# Altium PCB develer_2L_A4.PcbDoc
Units mm, origin at the board's own origin, x right, y up, seen from the top; angles counter-clockwise.
Board outline 16 x 12 mm, 2 copper layers (Top Layer, Bottom Layer), stack 1.57 mm thick; 3 components, 10 nets, 36 pads, 10 vias.
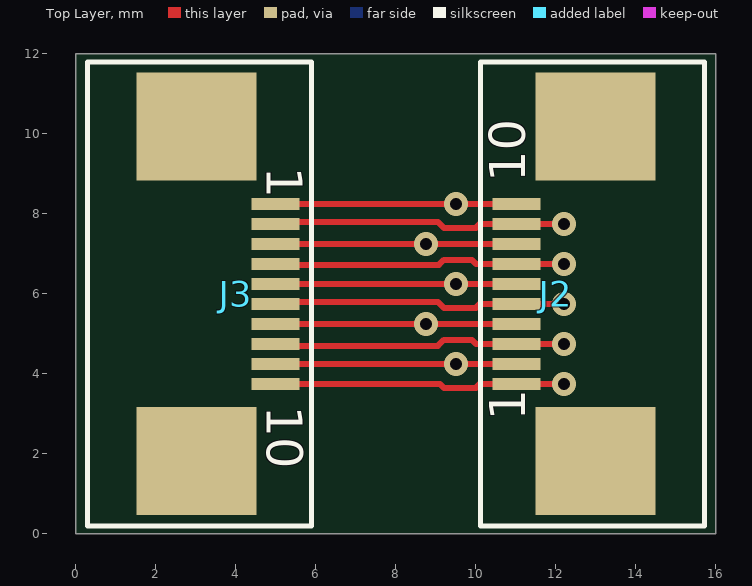
[diagram p0: Top Layer view]
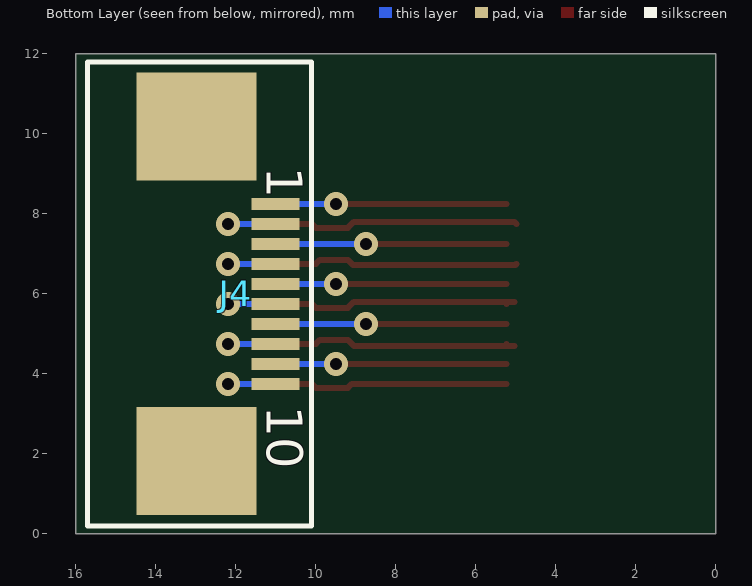
[diagram p1: Bottom Layer view, seen from below]

## Layer stack, top to bottom
Top Solder: solder mask 0.01, Solder Resist, Dk 3.5
Top Layer: signal copper 0.035
Dielectric1: core 1.5, FR-4, Dk 4.2
Bottom Layer: signal copper 0.035
Bottom Solder: solder mask 0.01, Solder Resist, Dk 3.5

## Board outline
0,0 0,12 16,12 16,0

## Design rules (kind name [scope] priority, off if disabled: settings)
Clearance [All] p1: gap=0.15 ignorepadtopadclearanceinfootprint=FALSE
ComponentClearance ComponentClearance_logo [HasFootprint('Develer_logo_30x12mm_PCB_NOTE') vs HasFootprint('Develer_logo_30x12mm_TB_Top')] p1: gap=0 collisioncheckmode=3 verticalgap=0 showdistances=FALSE
ComponentClearance [All] p2: gap=0.25 collisioncheckmode=3 verticalgap=0.25 showdistances=FALSE
DiffPairsRouting [All] p1: maxlimit=0.25 minlimit=0.25 mostfreqgap=0.25 toplayer_minwidth=0.25 toplayer_maxwidth=0.25 toplayer_prefwidth=0.25 bottomlayer_minwidth=0.25 bottomlayer_maxwidth=0.25 bottomlayer_prefwidth=0.25 maxuncoupledlength=12.7
Height [All] p1: minheight=0 maxheight=25 prefheight=12.5
HoleSize [All] p1: absolutevalues=TRUE maxlimit=10 minlimit=0.2 maxpercent=80.000 minpercent=20.000
HoleToHoleClearance [All] p1: gap=0.25 allowstackedmicrovias=TRUE
MinimumSolderMaskSliver [All] p1: minsoldermaskwidth=0.15
PlaneClearance [All] p1: clearance=0.5
PlaneConnect PlaneConnect_via [isvia] p1: planeconnectstyle=Direct reliefexpansion=0.508 reliefentries=4 reliefconductorwidth=0.254 reliefairgap=0.254
PlaneConnect [All] p2: planeconnectstyle=Relief reliefexpansion=0.6 reliefentries=4 reliefconductorwidth=0.6 reliefairgap=0.3
PolygonConnect PolygonConnect_via [isvia] p1: connectstyle=Direct reliefconductorwidth=0.254 reliefentries=4 polygonreliefangle="90 Angle" airgapwidth=0.254
PolygonConnect [All] p2: connectstyle=Relief reliefconductorwidth=0.6 reliefentries=4 polygonreliefangle="90 Angle" airgapwidth=0.6
RoutingCorners [All] p1: cornerstyle=45-Degree minsetback=2.5 maxsetback=2.5
RoutingVias [All] p1: holewidth=0.3 width=0.6 viastyle="Through Hole" minholewidth=0.2 minwidth=0.3 maxholewidth=0.5 maxwidth=1
SilkToSilkClearance [All] p1: silktosilkclearance=0.15
SilkToSolderMaskClearance [IsPad] p1: minsilkscreentomaskgap=0.15 clearancetoexposedcopper=TRUE
SolderMaskExpansion SolderMaskExpansion_via [isVia] p1: expansion=-10
SolderMaskExpansion [All] p2: expansion=0.05
UnRoutedNet [All] p1: checkbadconnections=TRUE
Width [All] p1: maxlimit=5 minlimit=0.15 preferedwidth=0.25
18 further rules are at their usual default settings.

## Components (designator, comment, footprint, x,y, rotation, side; value= is the part's Value field where it differs from the comment)
J2 "Capacitive Touch" fcc-zif_10pin_0.5mm 12,6 r90 top
J3 "Capacitive Touch" fcc-zif_10pin_0.5mm 4,6 r270 top
J4 "Capacitive Touch" fcc-zif_10pin_0.5mm 12,6 r270 bottom

## Footprints (in the part's own frame and the unit in brackets; to place one, negate y for a bottom-side part, rotate by r counter-clockwise, add the part's x,y. Pads: shape width x height; smd on the part's side, far side on the other; paste and mask are expansions set on the pad)
fcc-zif_10pin_0.5mm [mm] "10 pins"
  rect 0.3x1.2 smd: 1(-2.25,0.99) 2(-1.75,0.99) 3(-1.25,0.99) 4(-0.75,0.99) 5(-0.25,0.99) 6(0.25,0.99) 7(0.75,0.99) 8(1.25,0.99) 9(1.75,0.99) 10(2.25,0.99)
  rect 2.7x3 smd: Z1(-4.18,-0.99) Z2(4.18,-0.99)
  silkscreen extent -5.8,-3.71 5.8,1.89, body extent -5.7,-3.71 5.7,1.39, height 2.06

## Part data
J2 J3 J4: library part "Header 10", "10-pin, 0.5mm, SMT, ZIF, Horizontal, Top Contact", LatestRevisionDate=17-Jul-2002, LatestRevisionNote="Re-released for DXP Platform.", Publisher="Altium Limited"

## Via types
v1: diameter 0.6, hole 0.3, Top Layer to Bottom Layer, 10 vias

## Nets (pads, with @x,y where several pads share a name; then routed paths per layer and width w, separated by ;. In a path a pad name is that pad's centre, name@x,y a point inside that pad or via, vN(x,y) a via of type N, cw(c..) or ccw(c..) an arc to the next point about the centre after c; other vN are vias at no path point)
NetJ2_1: J2.1 J3.10 J4.10 | length 8.2
  Top Layer w0.15: J3.10@5.24,3.75 9.1,3.75 9.2,3.65 10,3.65 10.1,3.75 11.01,3.75 v1(12.2,3.75)
  Bottom Layer w0.15: J4.10@11.01,3.75 v1(12.2,3.75)
NetJ2_2: J2.2 J3.9 J4.9 | length 7.3
  Top Layer w0.15: J3.9@5.24,4.25 v1(9.5,4.25) J2.2
  Bottom Layer w0.15: v1(9.5,4.25) J4.9
NetJ2_3: J2.3 J3.8 J4.8 | length 8.5
  Top Layer w0.15: J3.8@5.04,4.7 9.05,4.7 9.2,4.85 9.9,4.85 10,4.75 J2.3 v1(12.2,4.75)
  Bottom Layer w0.15: J4.8 v1(12.2,4.75)
NetJ2_4: J2.4 J3.7 J4.7 | length 8
  Top Layer w0.15: J3.7@5.24,5.25 v1(8.75,5.25) J2.4
  Bottom Layer w0.15: v1(8.75,5.25) J4.7
NetJ2_5: J2.5 J3.6 J4.6 | length 8.5
  Top Layer w0.15: J3.6@5.04,5.8 9.05,5.8 9.2,5.65 10,5.65 10.1,5.75 J2.5 v1(12.2,5.75)
  Bottom Layer w0.15: J4.6 v1(12.2,5.75)
NetJ2_6: J2.6 J3.5 J4.5 | length 7.3
  Top Layer w0.15: J3.5@5.24,6.25 v1(9.5,6.25) J2.6
  Bottom Layer w0.15: v1(9.5,6.25) J4.5
NetJ2_7: J2.7 J3.4 J4.4 | length 8.5
  Top Layer w0.15: J3.4 5.015,6.725 9.075,6.725 9.2,6.85 9.9,6.85 10,6.75 v1(12.2,6.75)
  Bottom Layer w0.15: J4.4 v1(12.2,6.75)
NetJ2_8: J2.8 J3.3 J4.3 | length 8
  Top Layer w0.15: J3.3@5.24,7.25 v1(8.75,7.25) J2.8
  Bottom Layer w0.15: v1(8.75,7.25) J4.3
NetJ2_9: J2.9 J3.2 J4.2 | length 8.5
  Top Layer w0.15: J3.2 5.04,7.8 9.05,7.8 9.2,7.65 10,7.65 10.1,7.75 v1(12.2,7.75)
  Bottom Layer w0.15: J4.2 v1(12.2,7.75)
NetJ2_10: J2.10 J3.1 J4.1 | length 7.3
  Top Layer w0.15: J3.1@5.24,8.25 v1(9.5,8.25) J2.10
  Bottom Layer w0.15: v1(9.5,8.25) J4.1
pads on no net: J2.Z1 J2.Z2 J3.Z1 J3.Z2 J4.Z1 J4.Z2

## Silkscreen, mask and mechanical layers (free items; w line width, h text height)
Outline:
  the board outline again, w0.2
Drawing:
  text "Mechanical Characteristics" at 24.5,-44.5 h5
  text "Mechanical Characteristics" at 24.5,-44.5 h5
Assembly_top:
  text "Assembly TOP" at 24.5,-44.5 h5
Assembly_bot:
  text "Assembly Bottom" at -127.5,-44.25 h5
Note_top:
  text "Note TOP" at 24.5,-44.5 h5
Note_bot:
  text "Note Bottom" at -127.5,-44.25 h5
PCB_Note:
  drawing of 186 lines, arcs and shapes, not listed
  text "Plugged Vias" at 58.25,27.25 h5
  text "File Layer names:" at 56.25,24 h3.5
  text "GTO" at 56.25,20 h3
  text "Top Overlay" at 65.25,20 h3
  text "GTP" at 56.25,17 h3
  text "Top Paste" at 65.25,17 h3
  text "GTS" at 56.25,14 h3
  text "Top Solder" at 65.25,14 h3
  text "GTL" at 56.25,11 h3
  text "Top Layer" at 65.25,11 h3
  text "GBL" at 56.25,8 h3
  text "Bottom Layer" at 65.25,8 h3
  text "GBS" at 56.25,5 h3
  text "Bottom Solder" at 65.25,5 h3
  text "GBP" at 56.25,2 h3
  text "Bottom Paste" at 65.25,2 h3
  text "GBO" at 56.25,-1 h3
  text "Bottom Overlay" at 65.25,-1 h3
  text "GM1" at 56.25,-7 h3
  text "Outline" at 65.25,-7 h3
  text "GM7" at 56.25,-10 h3
  text "PCB_Note" at 65.25,-10 h3
  text "Layer" at 33.353,-15.546 h1.52
  text "Name" at 39.336,-15.546 h1.52
  text "Material" at 50.911,-15.546 h1.52
  text "Thickness" at 61.073,-15.546 h1.52
  text "Constant" at 69.524,-15.546 h1.52
  text "Board Layer Stack" at 77.443,-15.546 h1.52
  text "1" at 33.353,-18.594 h1.52
  text "Top Overlay" at 39.336,-18.594 h1.52
  text "2" at 33.353,-21.642 h1.52
  text "Top Solder" at 39.336,-21.642 h1.52
  text "Solder Resist" at 50.911,-21.642 h1.52
  text "0,39mil" at 61.073,-21.642 h1.52
  text "3,5" at 69.524,-21.642 h1.52
  text "3" at 33.353,-24.69 h1.52
  text "Top Layer" at 39.336,-24.69 h1.52
  text "Copper" at 50.911,-24.69 h1.52
  text "1,38mil" at 61.073,-24.69 h1.52
  text "4" at 33.353,-27.738 h1.52
  text "Dielectric1" at 39.336,-27.738 h1.52
  text "FR-4" at 50.911,-27.738 h1.52
  text "59,06mil" at 61.073,-27.738 h1.52
  text "4,2" at 69.524,-27.738 h1.52
  text "5" at 33.353,-30.786 h1.52
  text "Bottom Layer" at 39.336,-30.786 h1.52
  text "Copper" at 50.911,-30.786 h1.52
  text "1,38mil" at 61.073,-30.786 h1.52
  text "6" at 33.353,-33.834 h1.52
  text "Bottom Solder" at 39.336,-33.834 h1.52
  text "Solder Resist" at 50.911,-33.834 h1.52
  text "0,39mil" at 61.073,-33.834 h1.52
  text "3,5" at 69.524,-33.834 h1.52
  text "7" at 33.353,-36.882 h1.52
  text "Bottom Overlay" at 39.336,-36.882 h1.52
  text "PCB Note" at 24.5,-44.5 h5
  text "Board Name" at 24.5,-49.05 h3
  text ".prj_name" at 40.5,-49.05 h3
  text "P/N" at 24.5,-52.55 h3
  text ".prj_pn" at 40.5,-52.55 h3
  text "Author" at 24.5,-56.05 h3
  text "AUTHOR" at 40.5,-56.05 h3
  text "Date" at 24.5,-59.65 h3
  text ".prj_date" at 40.5,-59.65 h3
  text "Revision" at 24.5,-63.25 h3
  text ".prj_pcb" at 40.5,-63.25 h3
  text "A4" at 83,-63.25 h3
TitleBlock_top:
  lines w0.3: -3,-64 -3,-46.5 23.5,-46.5 ; 23.5,-64 23.5,-52 ; 23.5,-60.5 91,-60.5 ; 23.5,-57 91,-57 ; 23.5,-53.5 91,-53.5 ; 23.5,-52.55 23.5,-50 ; 39.5,-64 39.5,-60.5 39.5,-57 39.5,-53.5 39.5,-50 ; 81,-64 81,-60.5 ; 91,-50 39.5,-50 ; 91,-46.5 39.5,-46.5 ; 91,-39.5 39.5,-39.5 23.5,-39.5 23.5,-43 23.5,-46.5 ; 23.5,-50 23.5,-46.5 ; 23.5,-50 39.5,-50 ; 23.5,-46.5 39.5,-46.5 ; 39.5,-50 39.5,-46.5 ; -199,-69 96,-69 96,141 -199,141 -199,-69 ; -194,-64 91,-64 91,136 -194,136 -194,-64
  text "Board Name" at 24.5,-49.05 h3
  text ".prj_name" at 40.5,-49.05 h3
  text "P/N" at 24.5,-52.55 h3
  text ".prj_pn" at 40.5,-52.55 h3
  text "Author" at 24.5,-56.05 h3
  text "AUTHOR" at 40.5,-56.05 h3
  text "Date" at 24.5,-59.65 h3
  text ".prj_date" at 40.5,-59.65 h3
  text "Revision" at 24.5,-63.25 h3
  text ".prj_pcb" at 40.5,-63.25 h3
  text "A4" at 83,-63.25 h3
TitleBlock_bot:
  lines w0.3: -199,-69 -199,141 96,141 ; -194,-64 -194,136 91,136 ; -194,-60.5 -126.5,-60.5 ; -194,-57 -126.5,-57 ; -194,-53.5 -126.5,-53.5 ; -194,-50 -142.5,-50 ; -194,-46.5 -142.5,-46.5 ; -194,-39.5 -142.5,-39.5 -126.5,-39.5 -126.5,-43 -126.5,-46.5 ; -184,-64 -184,-60.5 ; -142.5,-64 -142.5,-60.5 -142.5,-57 -142.5,-53.5 -142.5,-50 ; -126.5,-64 -126.5,-52 ; -126.5,-52.55 -126.5,-50 ; -100,-64 -100,-46.5 -126.5,-46.5 ; -142.5,-50 -142.5,-46.5 ; -142.5,-50 -126.5,-50 ; -142.5,-46.5 -126.5,-46.5 ; -126.5,-50 -126.5,-46.5
  text ".prj_name" at -143.5,-49.05 h3
  text "Board Name" at -127.5,-49.05 h3
  text ".prj_pn" at -143.5,-52.55 h3
  text "P/N" at -127.5,-52.55 h3
  text "AUTHOR" at -143.5,-56.05 h3
  text "Author" at -127.5,-56.05 h3
  text ".prj_date" at -143.5,-59.65 h3
  text "Date" at -127.5,-59.65 h3
  text "A4" at -186,-63.25 h3
  text ".prj_pcb" at -143.5,-63.25 h3
  text "Revision" at -127.5,-63.25 h3

## Text inside footprints (layer, text, board x,y; h text height)
J2: Top Overlay "10" at 11.229,8.794 h0.9 r90; Top Overlay "1" at 11.229,2.825 h0.9 r90
J3: Top Overlay "10" at 4.771,3.206 h0.9 r270; Top Overlay "1" at 4.771,9.175 h0.9 r270
J4: Bottom Overlay "10" at 11.229,3.206 h0.9 r90; Bottom Overlay "1" at 11.229,9.175 h0.9 r90